# Altium PCB recall_discrete_v0_1.PcbDoc
Units mil, origin at the board's own origin, x right, y up, seen from the top; angles counter-clockwise.
Board outline 1000 x 1000 mil, 2 copper layers (Component Side, Bottom Layer), stack 12.8 mil thick; 16 components, 9 nets, 45 pads, 0 vias.
Unrouted connection lines stored in the file: 25.
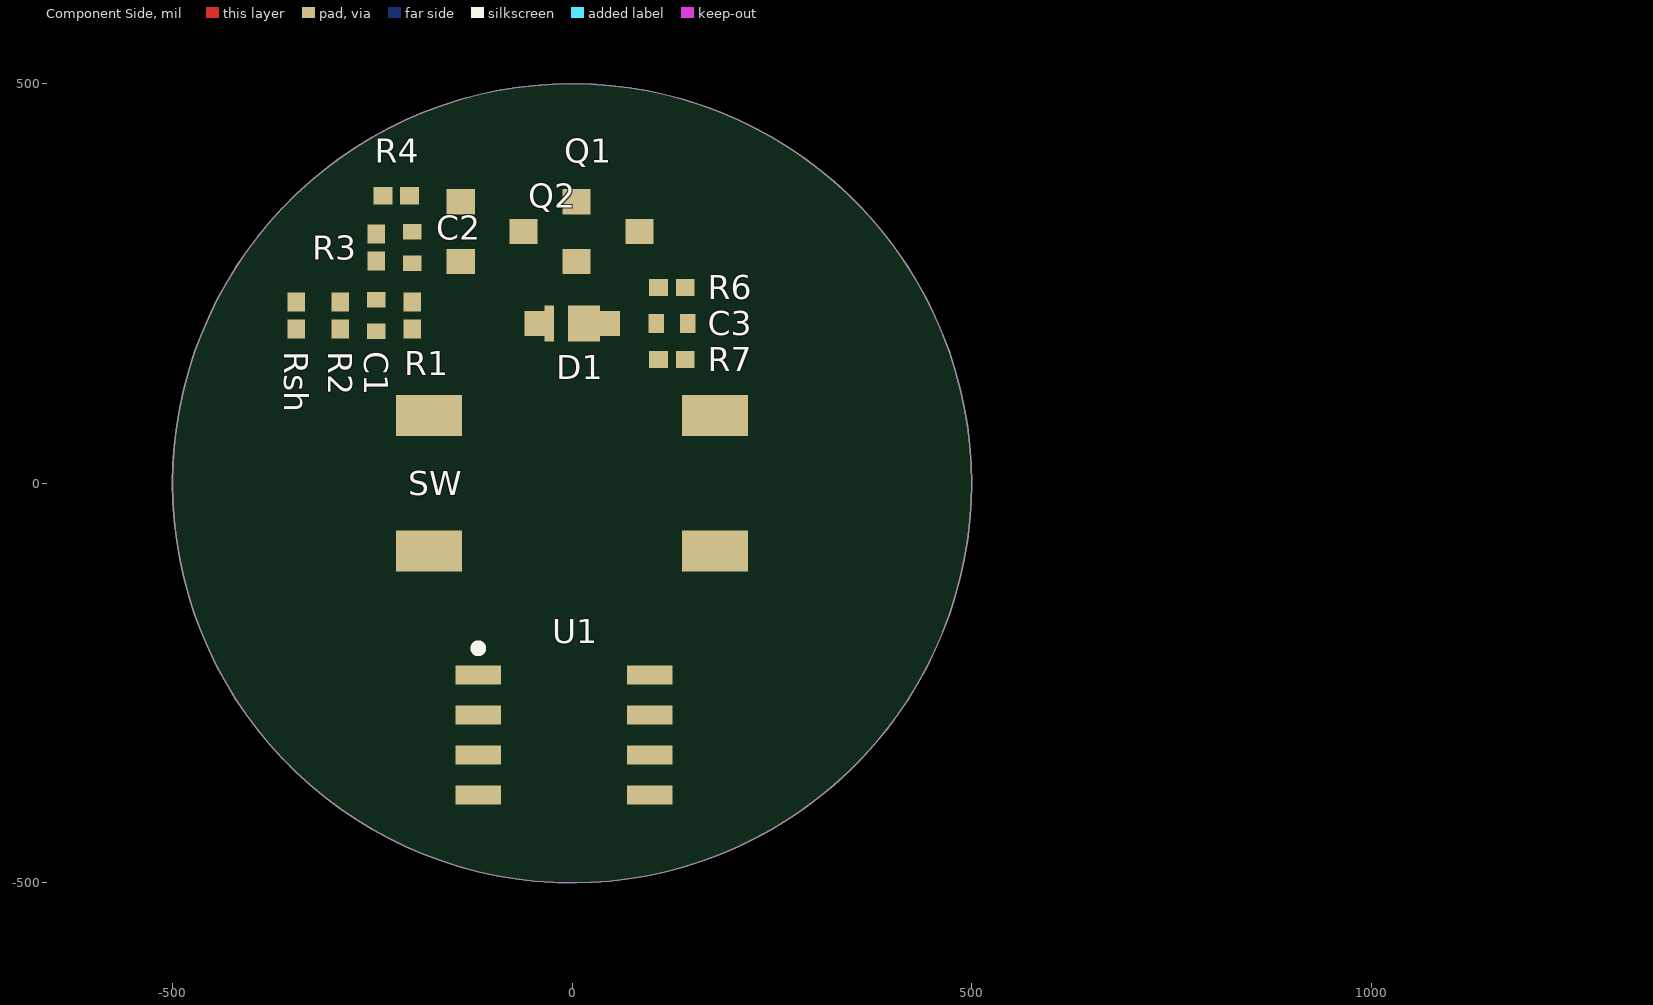
[diagram p0: Component Side view]
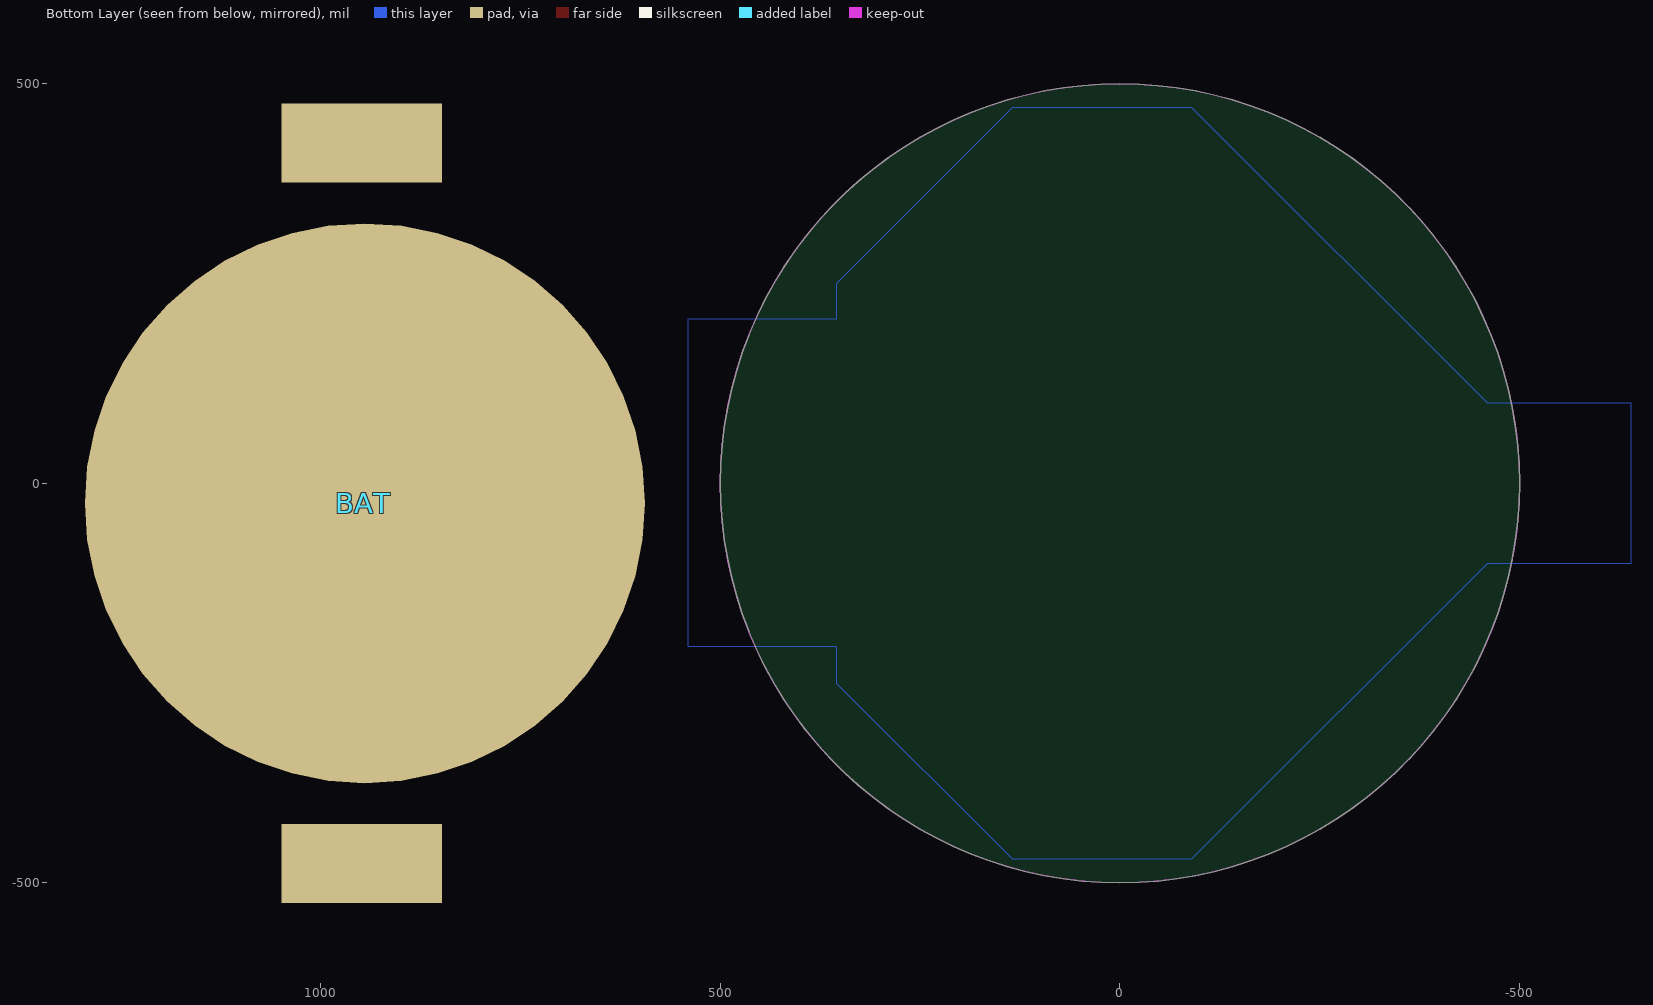
[diagram p1: Bottom Layer view, seen from below]

## Layer stack, top to bottom
Top Solder: solder mask 0.4, Solder Resist, Dk 3.5
Component Side: signal copper 1.4
Dielectric 1: core 10, FR-4, Dk 4.2
Bottom Layer: signal copper 1.4
Solder Side: solder mask 0.4, Solder Resist, Dk 3.5

## Board outline
0,-500 cw(c0,0) -500,0 cw(c0,0) 0,500 cw(c0,0) 500,0 cw(c0,0)

## Design rules (kind name [scope] priority, off if disabled: settings)
BoardOutlineClearance [All] p1: gap=15
Clearance [All] p1: gap=6
HoleSize [All] p1: absolutevalues=TRUE maxlimit=100 minlimit=13 maxpercent=80.000 minpercent=20.000
HoleToHoleClearance [All] p1: gap=6 allowstackedmicrovias=TRUE
MinimumAnnularRing [All] p1: minimumring=7
MinimumSolderMaskSliver [All] p1: minsoldermaskwidth=0
PolygonConnect [All] p1: connectstyle=Relief reliefconductorwidth=10 reliefentries=4 polygonreliefangle="90 Angle" airgapwidth=10
RoomDefinition recall_discrete_v0_1 [InComponentClass('recall_discrete_v0_1')] p1: confinementstyle=ConfineIn formatcopy=TRUE lockcomponents=FALSE outline -3105,-2070 3685,-2070 3685,2625 -3105,2625
RoutingVias [All] p1: holewidth=13 width=27 viastyle="Through Hole" minholewidth=13 minwidth=27 maxholewidth=28 maxwidth=50
SilkToSilkClearance [All] p1: silktosilkclearance=6
SilkToSolderMaskClearance [IsPad] p1: minsilkscreentomaskgap=6 clearancetoexposedcopper=TRUE
SolderMaskExpansion [All] p1: expansion=4
Width [All] p1: maxlimit=50 minlimit=6 preferedwidth=6
25 further rules are at their usual default settings.

## Components (designator, comment, footprint, x,y, rotation, side; value= is the part's Value field where it differs from the comment)
BAT "CR2032" BAT-HLD-001 945,-25 r90 bottom
C1 "CAP" CAP_0402R -245,210 r270 top
C2 "CAP" CAP_0402R -200,295 r90 top
C3 "CAP" CAP_0402R 125,200 r0 top
D1 "MP2016" MP2016_centered 0,200 r180 top
Q1 "NPN" SOT-23 45,315 r0 top
Q2 "PNP" SOT-23 -100,315 r0 top
R1 "RES" RES_0402 -200,210 r270 top
R2 "RES" RES_0402 -290,210 r270 top
R3 "RES" RES_0402 -245,295 r270 top
R4 "RES" RES_0402 -220,360 r0 top
R6 "RES" RES_0402 125,245 r180 top
R7 "RES" RES_0402 125,155 r180 top
Rsh "RES" RES_0402 -345,210 r270 top
SW "4-1437565-1" 4-1437565-1 0,0 r90 top
U1 "LMC555" SOIC-8 -10,-315 r0 top

## Footprints (in the part's own frame and the unit in brackets; to place one, negate y for a bottom-side part, rotate by r counter-clockwise, add the part's x,y. Pads: shape width x height; smd on the part's side, far side on the other; paste and mask are expansions set on the pad)
4-1437565-1 [mm] "TE Tactile Switch, 6mm x 6mm x 4mm"
  rect 1.3x2.1 smd: 1(-2.15,4.55) 1(2.15,4.55) 2(-2.15,-4.55) 2(2.15,-4.55)
  body extent -3,-5 3,5, height 5.05
BAT-HLD-001 [mm] "Battery holder for CR2032"
  rect 2.5x5.1 smd: 1(-11.45,0.1) 1(11.45,0.1)
  round 17.8 smd: 2(0,0)
  body extent -15.37,-10.15 15.37,9.9, height 3.96
CAP_0402R [mm] "Capacitor 0402 reflow soldering"
  rect 0.5x0.6 smd: 1(-0.5,0) 2(0.5,0)
  body extent -0.5,-0.3 0.5,0.3, height 0.2
MP2016_centered [mm] "Luminus XNOVA LED"
  rect 0.3x1.14 smd: A(0.731,0)
  rect 0.65x0.8 smd: A(1.181,0) C(-1.204,0)
  rect 1.02x1.14 smd: C(-0.379,0)
  body extent -1,-0.8 1,0.8, height 0.55
RES_0402 [mm]
  rect 0.6x0.55 smd: 1(-0.425,0) 2(0.425,0)
  body extent -0.57,-0.28 0.57,0.27, height 0.41
SOIC-8 [mm] "LMC555"
  rect 1.45x0.6 smd: 1(-2.725,1.905) 2(-2.725,0.635) 3(-2.725,-0.635) 4(-2.725,-1.905) 5(2.725,-1.905) 6(2.725,-0.635) 7(2.725,0.635) 8(2.725,1.905)
  silkscreen extent -2.85,2.63 -2.6,2.88, body extent -3,-2.5 3,2.5, height 1.75
SOT-23 [mm]
  rect 0.9x0.8 smd: 1(-1,0.95) 2(-1,-0.95) 3(1,0)
  body extent -0.7,-1.52 0.7,1.52, height 1.11

## Part data
BAT: library part Battery
C1 C2 C3: "Capacitor"
D1: "MP2016 White LED"
Q1: "NPN General Purpose Transistor, 2N3904, MMBT2222AL"
Q2: "PNP General Purpose Transistor, 2N3906, MMBT2907AL"
R1 R2 R3 R4 R6 R7 Rsh: "Resistor"
SW: library part SW-TACT, "Translucent Conductive Silicone Elastomer Switch"

## Nets (pads, with @x,y where several pads share a name; then routed paths per layer and width w, separated by ;. In a path a pad name is that pad's centre, name@x,y a point inside that pad or via, vN(x,y) a via of type N, cw(c..) or ccw(c..) an arc to the next point about the centre after c; other vN are vias at no path point)
GND: BAT.2 Q1.2 R7.1 SW.2 U1.1
NetC1_1: C1.1 Q2.2 R1.1
NetC2_1: C2.1 Q2.1 R2.1 R3.2
NetC2_2: C2.2 R4.2
NetC3_1: C3.1 D1.C R3.1 R4.1 R7.2
NetC3_2: C3.2 Q1.3 R6.1
TRIGGER: Q1.1 Q2.3
VBAT: BAT.1 Rsh.2
VDD: C1.2 D1.A R1.2 R2.2 R6.2 Rsh.1
pads on no net: SW.1 U1.2 U1.3 U1.4 U1.5 U1.6 U1.7 U1.8

## Polygon pours and split planes (outlines as drawn)
GND on Bottom Layer "Ground Plane" (solid, remove dead copper, shelved, pour order 6): -640,-100 -640,100 -460,100 -90,470 135,470 355,250 355,205 541,205 541,-204 356,-204 355,-205 355,-250 135,-470 -90,-470 -460,-100

## Keep-outs
Keep-Out Layer:
  circle w1: c0,0 r500